# EAGLE board ClassD-V1 (EAGLE 9.5.1)
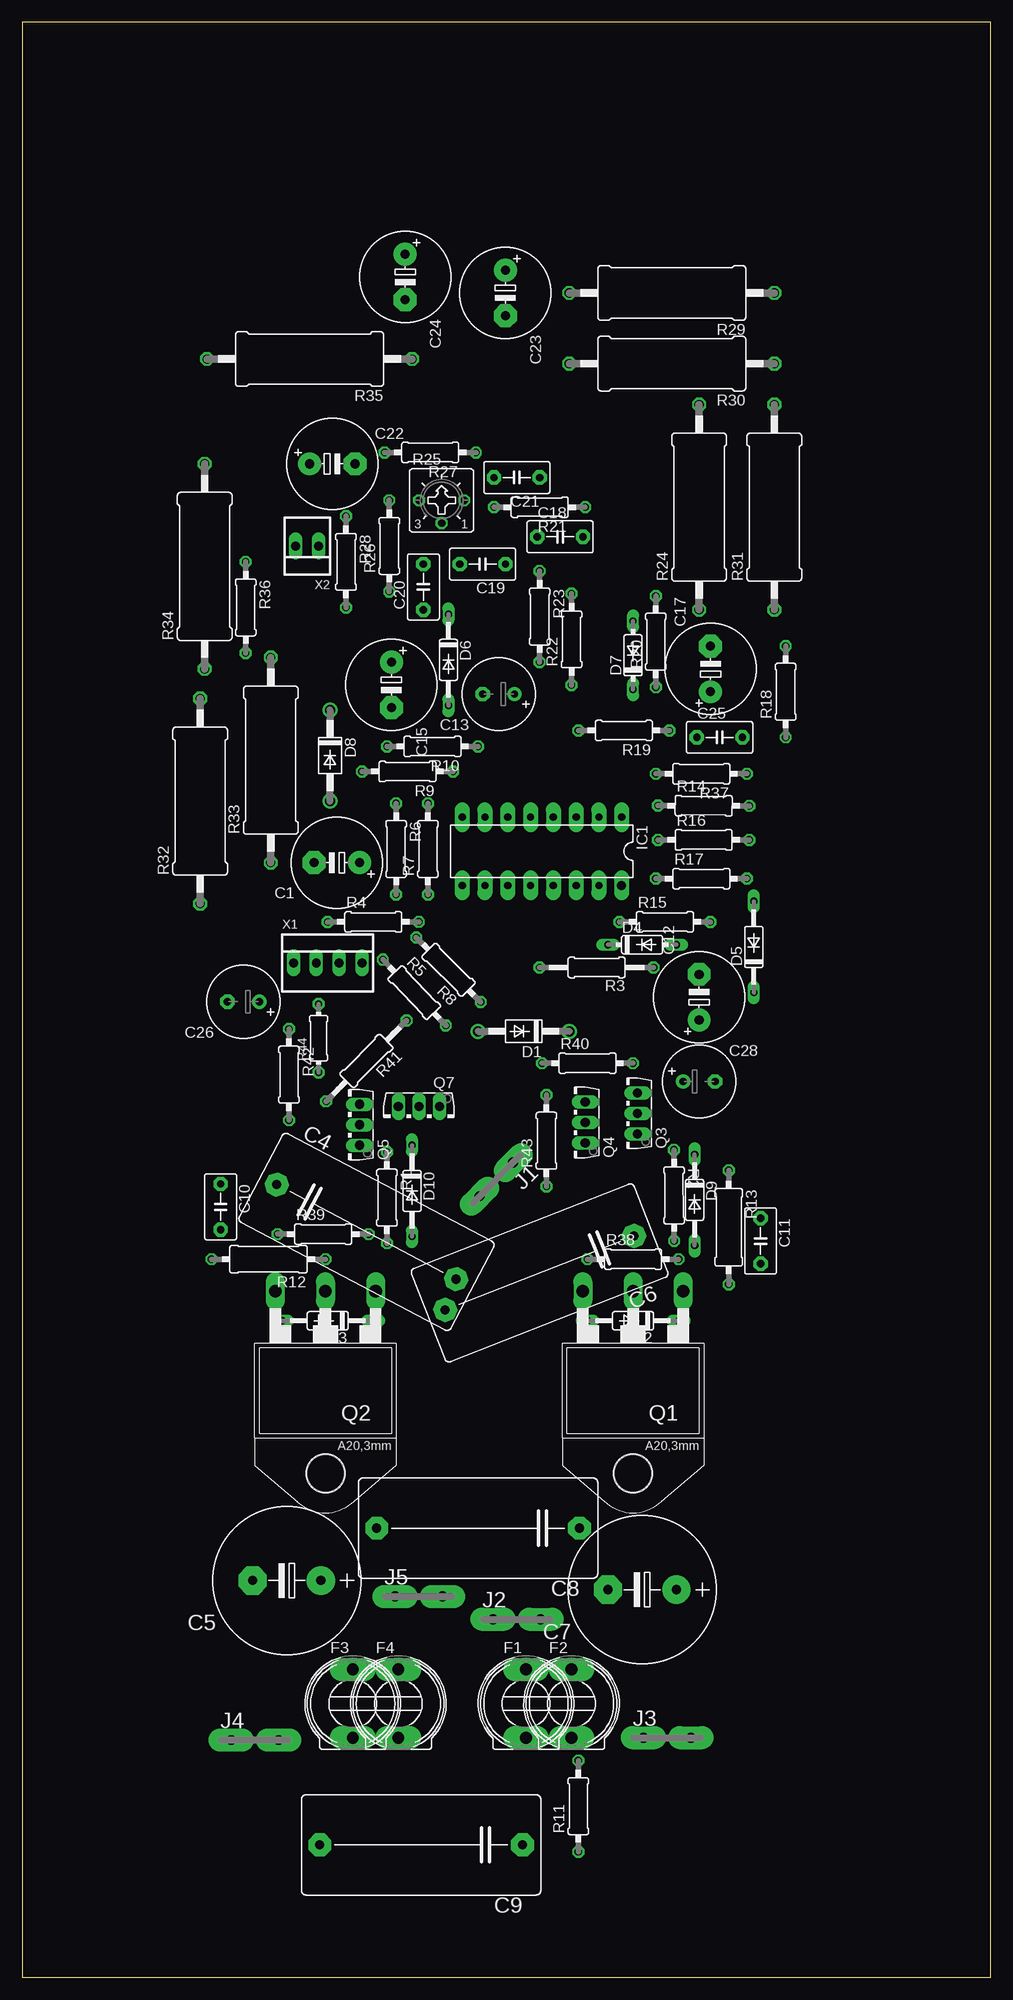
[diagram p0: board, top side]
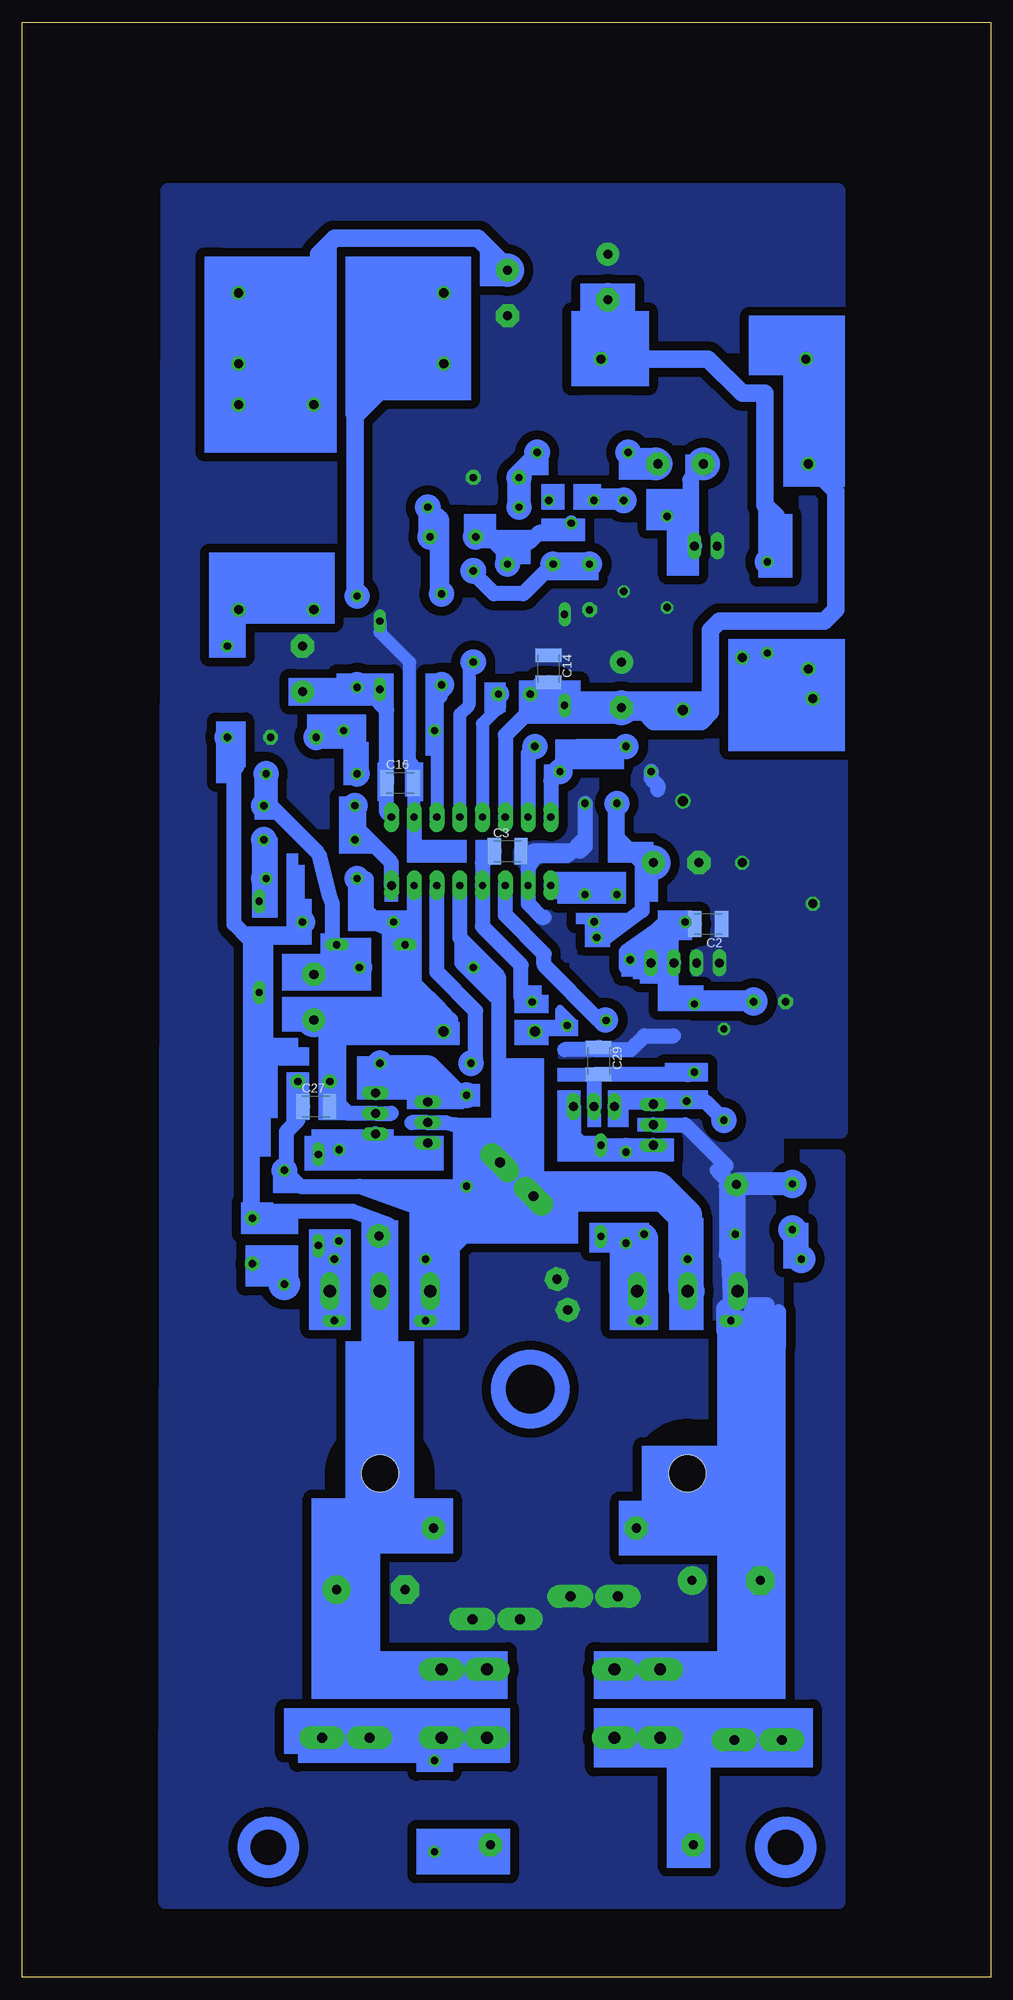
[diagram p1: board, bottom side, seen from below]

Size 107.93 x 217.86 mm. Coordinates in mm from the lower left corner, seen from the top.
Outline: 0,0 107.93,0 107.93,217.86 0,217.86 0,0
Copper layers (1*16): Top 0.035mm / dielectric 1.5mm / Bottom 0.035mm
Design rules "default": minimum track width 10mil, minimum drill 24mil, track to track 8mil, track to pad 8mil, pad to pad 8mil, via to via 8mil, smd to smd 8mil, copper to edge 40mil, drill to drill 8mil, minimum pad ring 10mil, minimum via ring 8mil, stop-mask expansion 4mil, vias tented up to drill 0mil, thermal gap 10mil

## Footprints (pad centres in the part's own frame; a part is rotated, then mirrored left to right if it is on the bottom)
E5-10,5 = drill 1.016 pad 2.54: + -2.54,0 | drill 1.016 pad 2.54 octagon: - 2.54,0
C1210K = smd 1.5 x 2.9: 1 -1.5,0; 2 1.5,0
C22.5B11 = drill 1.016 pad 2.54 octagon: 1 -11.303,0; 2 11.303,0
E7,5-16 = drill 1.016 pad 3.15: + -3.81,0 | drill 1.016 pad 3.15 octagon: - 3.81,0
C5B3.5 = drill 0.813 pad 1.6 octagon: 1 -2.54,0; 2 2.54,0
E3,5-8 = drill 0.813 pad 1.6: + -1.778,0 | drill 0.813 pad 1.6 octagon: - 1.778,0
DO41-10 = drill 1.118: A 5.08,0; C -5.08,0
DO35-10 = drill 0.813 long: A 5.08,0; C -5.08,0
DO35-7 = drill 0.813 long: A 3.81,0; C -3.81,0
KS9V = drill 1.321 pad 2.54 long: 1 0,3.81; 2 0,-3.81
DIL16 = drill 0.813 pad 1.676 long: 1 -8.89,-3.81; 2 -6.35,-3.81; 3 -3.81,-3.81; 4 -1.27,-3.81; 5 1.27,-3.81; 6 3.81,-3.81; 7 6.35,-3.81; 8 8.89,-3.81; 9 8.89,3.81; 10 6.35,3.81; 11 3.81,3.81; 12 1.27,3.81; 13 -1.27,3.81; 14 -3.81,3.81; 15 -6.35,3.81 | drill 1 pad 1.676 long: 16 -8.89,3.81
F061.040 = drill 1.1 pad 2.54 long: A1 -2.65,0; A2 2.65,0
TOP3 = drill 1.397 long: 1 -5.588,-7.62; 2 0,-7.62; 3 5.588,-7.62 | hole 4.115: 0,12.7
TO126AV = drill 1.016 long: B 2.286,-1.27; C 0,-1.27; E -2.286,-1.27
0207/10 = drill 0.813 octagon: 1 -5.08,0; 2 5.08,0
0207/12 = drill 0.813 octagon: 1 -6.35,0; 2 6.35,0
0309/12 = drill 0.813 octagon: 1 -6.35,0; 2 6.35,0
0617/22 = drill 1.016 octagon: 1 -11.43,0; 2 11.43,0
CT6 = drill 0.813 octagon: A 2.515,0; E -2.515,0; S 0,-2.54
0204/7 = drill 0.813 octagon: 1 -3.81,0; 2 3.81,0
22-23-2041 = drill 1 long: 1 -3.81,0; 2 -1.27,0; 3 1.27,0; 4 3.81,0
22-23-2021 = drill 1 long: 1 -1.27,0; 2 1.27,0

## Placement (x,y rotation side)
C1  22uF  [E5-10,5]  35.05,124.21 180 top
C2  .1  [C1210K]  31.5,117.35 180 bottom
C3  .1  [C1210K]  53.85,125.48 0 bottom
C4  220nF  [C22.5B11]  38.35,83.06 332.2 top
C5  470uF  [E7,5-16]  29.46,44.2 180 top
C6  220nF  [C22.5B11]  57.66,78.49 201.4 top
C7  470uF  [E7,5-16]  69.09,43.18 180 top
C8  220nF  [C22.5B11]  50.8,50.04 180 top
C9  220nF  [C22.5B11]  44.45,14.73 180 top
C10  1nF  [C5B3.5]  22.1,85.85 270 top
C11  1nF  [C5B3.5]  82.3,82.04 270 top
C12  22uF  [E5-10,5]  75.44,109.22 90 top
C13  10uF  [E3,5-8]  53.09,143 180 top
C14  .1  [C1210K]  49.28,145.8 270 bottom
C15  22uF  [E5-10,5]  41.15,144.02 270 top
C16  .1  [C1210K]  65.79,133.1 0 bottom
C17  22uF  [E5-10,5]  76.71,145.8 90 top
C18  2n2  [C5B3.5]  59.94,160.53 0 top
C19  2n2  [C5B3.5]  51.31,157.48 180 top
C20  1nF  [C5B3.5]  44.7,154.94 90 top
C21  HF_FLT  [C5B3.5]  55.12,167.13 180 top
C22  22uF  [E5-10,5]  34.54,168.66 0 top
C23  22uF  [E5-10,5]  53.85,187.71 270 top
C24  22uF  [E5-10,5]  42.67,189.48 270 top
C25  150pF  [C5B3.5]  77.72,138.18 0 top
C26  10uF  [E3,5-8]  24.64,108.71 180 top
C27  .1  [C1210K]  75.18,97.03 0 bottom
C28  10uF  [E3,5-8]  75.44,99.82 0 top
C29  .1  [C1210K]  43.69,102.11 270 bottom
D1  MUR1100  [DO41-10]  55.88,105.41 180 top
D2  18V  [DO35-10]  68.07,73.15 180 top
D3  18V  [DO35-10]  34.04,73.15 180 top
D4  15V  [DO35-7]  69.09,115.06 0 top
D5  MUR  [DO35-10]  81.53,114.81 90 top
D6  5V6  [DO35-10]  47.5,146.81 270 top
D7  5V6  [DO35-7]  68.07,147.32 90 top
D8  MUR1100  [DO41-10]  34.29,136.14 270 top
D9  4148  [DO35-10]  74.93,86.61 270 top
D10  4148  [DO35-10]  43.43,87.63 270 top
F1  7A  [KS9V]  56.13,30.48 0 top
F2  [KS9V]  61.21,30.48 0 top
F3  [KS9V]  36.83,30.48 0 top
F4  7A  [KS9V]  41.91,30.48 0 top
IC1  IRS2092  [DIL16]  57.91,125.48 180 top
J1  PWM  [F061.040]  52.83,88.9 225 top
J2  GND  [F061.040]  55.12,39.88 0 top
J3  VCC  [F061.040]  71.88,26.67 0 top
J4  VEE  [F061.040]  25.91,26.42 0 top
J5  PWMGND  [F061.040]  44.2,42.42 0 top
Q1  FQA27N25  [TOP3]  68.07,68.83 180 top
Q2  FQA27N25  [TOP3]  33.78,68.83 180 top
Q3  BD139  [TO126AV]  67.31,96.27 90 top
Q4  BD140  [TO126AV]  61.47,95.25 90 top
Q5  BD140  [TO126AV]  36.32,95 90 top
Q7  BD139  [TO126AV]  44.2,95.76 180 top
R1  10  [0207/10]  40.64,86.87 270 top
R2  10  [0207/10]  72.64,87.12 270.1 top
R3  0R  [0207/12]  64.01,112.52 180 top
R4  10  [0207/10]  39.12,117.6 0.1 top
R5  4R7  [0207/10]  43.69,109.73 313.7 top
R6  NC  [0207/10]  41.66,125.73 270 top
R7  10K  [0207/10]  45.21,125.73 90 top
R8  0  [0207/10]  47.5,112.27 135 top
R9  7K5  [0207/10]  42.93,134.37 180 top
R10  10K  [0207/10]  45.72,137.16 180 top
R11  1  [0207/10]  61.98,19.05 90 top
R12  10  [0309/12]  27.43,80.01 180 top
R13  10  [0309/12]  78.74,83.57 270 top
R14  10K  [0207/10]  75.95,130.56 359.8 top
R15  33K  [0207/10]  71.63,117.6 0 top
R16  9K1  [0207/10]  75.95,126.75 0 top
R17  10K  [0207/10]  75.69,122.43 0 top
R18  0R  [0207/10]  85.09,143.26 90 top
R19  100K  [0207/10]  67.06,138.94 180 top
R20  0R  [0207/10]  70.61,148.84 90 top
R21  3K  [0207/10]  57.66,163.83 180 top
R22  0R  [0207/10]  61.21,149.1 90 top
R23  0R  [0207/10]  57.66,151.64 270 top
R24  4K7  [0617/22]  75.44,163.83 90 top
R25  2K  [CT6]  46.74,164.59 0 top
R26  100  [0207/10]  40.89,159.51 90 top
R27  470  [0207/10]  45.47,169.93 180 top
R28  69K  [0207/10]  36.07,157.73 270 top
R29  4K7  [0617/22]  72.39,187.71 180 top
R30  4K7  [0617/22]  72.39,179.83 180 top
R31  4K7  [0617/22]  83.82,163.83 90 top
R32  4K7  [0617/22]  19.81,131.06 90 top
R33  4K7  [0617/22]  27.69,135.64 90 top
R34  4K7  [0617/22]  20.32,157.23 90 top
R35  4K7  [0617/22]  32,180.34 180 top
R36  0  [0207/10]  24.89,152.65 270 top
R37  1K  [0207/10]  75.69,134.11 180 top
R38  10K  [0207/10]  68.07,80.01 0 top
R39  10K  [0207/10]  33.53,82.8 0 top
R40  10  [0207/10]  62.99,101.85 0 top
R41  10  [0207/12]  38.35,102.11 225.1 top
R42  10K  [0207/10]  29.72,100.58 270 top
R43  10K  [0207/10]  58.42,93.22 90 top
R44  0R  [0204/7]  33.02,104.65 90 top
X1  12V  [22-23-2041]  34.04,113.03 0 top
X2  IN  [22-23-2021]  31.75,159.51 180 top

## Library data of the parts
C1-C3 C5 C7 C12-C17 C22-C24 C26-C29 R1-R24 R26-R44 = resistor
C4 C6 C8-C11 C18-C21 C25 = capacitor-wima
D1-D10 = diode
F1-F4 = fuse; OC_FARNELL: unknown; OC_NEWARK: unknown
IC1 = ic-package
J1-J5 = con-faston; OC_FARNELL: unknown; OC_NEWARK: unknown
Q1 Q2 = transistor-fet
Q3-Q5 Q7 = transistor-power
R25 = pot
X1 = con-molex; MF: MOLEX; MPN: 22-23-2041; OC_FARNELL: 1462920; OC_NEWARK: 38C0355
X2 = con-molex; MF: MOLEX; MPN: 22-23-2021; OC_FARNELL: 1462926; OC_NEWARK: 25C3832

## Nets
COM: C1.- C2.1 C3.2 C4.1 C5.- C8.2 C10.1 C26.- C29.1 D3.A D8.A F3.1 F4.1 IC1.10 Q2.3 Q5.C R7.2 R9.2 R32.1 R33.1 R39.1 R42.1 X1.1 X1.2
N$1: D2.C D9.A Q1.1 R2.2 R38.2
N$3: D3.C D10.A Q2.1 R1.2 R39.2
N$4: IC1.8 R9.1 R10.2
N$5: C6.1 C7.+ C8.1 C11.1 D5.C F1.1 F2.1 Q1.2 R15.2 R18.1
N$6: IC1.14 R40.1
N$7: IC1.11 R41.1
N$8: D1.A R5.2
N$9: C9.2 F3.2 F4.2 J4.A1 J4.A2
N$10: C3.1 IC1.12 R8.1
N$11: C12.+ C27.2 C28.+ D1.C D4.C IC1.15 Q3.C R15.1 R17.1
N$12: IC1.9 R6.2 R7.1
N$13: C1.+ R4.2 R6.1 R8.2
N$14: C9.1 R11.1
N$15: C11.2 R13.2
N$16: D9.C Q3.E Q4.E R2.1
N$17: R25.E R26.2
N$18: C2.2 C26.+ R4.1 R5.1 R44.2 X1.3 X1.4
N$19: IC1.7 R10.1
N$20: F1.2 F2.2 J3.A1 J3.A2 R11.2
N$21: C10.2 R12.2
N$22: IC1.16 R14.1 R16.1
N$23: D5.A R16.2 R17.2
N$24: C13.+ IC1.5
N$25: C25.1 R19.1 R37.2
N$26: IC1.3 R19.2 R22.1
N$27: C18.1 C19.1 R25.S
N$28: C19.2 C20.2 R23.1
N$29: C18.2 R21.1 R22.2
N$30: IC1.4 R23.2
N$31: R18.2 R24.1 R31.1
N$32: C21.2 R21.2 R27.1
N$33: C22.- R27.2
N$34: C22.+ R28.1 X2.1
N$35: C24.- R35.1 R36.1
N$36: C23.+ R24.2 R29.1 R30.1 R31.2
N$37: R20.2 R29.2 R30.2
N$38: R32.2 R33.2 R34.1 R36.2
N$39: C13.- C14.2 C15.- D6.A D8.C IC1.6 R34.2 R35.2
N$40: C12.- D4.A R3.1 R14.2 R37.1
N$41: C27.1 C28.- D2.A IC1.13 J1.A1 J1.A2 Q1.3 Q2.2 Q4.C R3.2 R12.1 R13.1 R38.1 R43.1
N$43: Q5.B Q7.B R41.2 R42.2
N$44: Q3.B Q4.B R40.2 R43.2
N$45: C29.2 Q7.C R44.1
N$47: D10.C Q5.E Q7.E R1.1
PGND: C4.2 C5.+ C6.2 C7.- C14.1 C15.+ C16.2 C17.- C20.1 C21.1 C23.- C24.+ C25.2 D6.C D7.A IC1.2 J2.A1 J2.A2 J5.A1 J5.A2 R26.1 R28.2 X2.2
PGND1: C16.1 C17.+ D7.C IC1.1 R20.1

## Tracks (layer width: path | path; a pad name or v marks a point on that pad's centre or on a via)
COM
  Bottom 1.422: C5.- 27.94,34.29 F3.1 F4.1
  Bottom 1.676: 29.46,88.14 29.46,80.52 29.21,80.26 D3.A | IC1.10 51.56,123.7 50.8,124.97 47.24,124.97 45.21,127 R7.2 45.21,125.98 45.72,125.48 51.05,125.48 51.56,124.97 51.56,119.63 50.04,118.11 49.78,118.11 | R9.2 37.85,133.6 37.08,132.84 37.08,132.33 | D3.A 28.96,76.2 28.19,76.2 28.19,88.33 C4.1 28.89,88.33 30.48,89.92 29.46,90.42 34.04,95 Q5.C | C8.2 28.96,51.56 28.96,52.07 | 28.96,52.07 D3.A | 23.62,74.17 23.62,70.36 24.89,70.36 24.89,74.93 26.67,74.93 26.67,73.91 25.65,73.91 25.65,71.88 25.91,71.88 25.91,73.66 26.92,73.66 26.92,71.88 27.18,71.88 27.18,73.41 28.45,73.41 28.45,71.88 28.7,71.88 28.7,74.42 29.46,74.42 29.46,71.88 29.72,71.88 29.72,74.68 | C5.- 27.69,43.18 27.69,52.07 28.96,52.07 | C29.1 43.92,103.38 | 43.92,103.38 47.5,103.38 | 43.92,103.38 40.13,103.38 38.61,104.9 35.31,104.9
  Bottom 2.54: C10.1 28.36,88.39 C4.1
  pour Bottom (isolate 1.016, no thermals): 38.61,137.41 16.76,137.41 16.76,94.23 23.88,94.23 23.88,72.39 41.91,72.39 62.99,103.38 62.74,103.12 50.55,129.29 46.99,132.84 39.88,133.1
N$1
  Bottom 1.676: R38.2 73.15,82.51 R2.2 73.16,81.53 D9.A | R38.2 D2.C | R38.2 73.66,79.5 Q1.1
  Bottom 1.93: Q1.1 73.15,76.96 D2.C
N$2
  Bottom 1.676: 36.83,116.84 40.64,113.79 40.64,112.52 39.88,112.52 40.64,114.3 36.32,117.35
N$3
  Bottom 1.676: D10.A 42.93,82.04 40.64,82.04 | R39.2 39.62,81.79 R1.2 | 41.15,81.79 R1.2 | R1.2 40.64,82.04 | R1.2 40.39,82.04 40.64,82.04
  Bottom 1.93: R1.2 D3.C 39.37,79.76 Q2.1
N$4
  Bottom 1.676: R10.2 45.97,137.16 48.01,135.13 R9.1 49.02,133.35 IC1.8
N$5
  Bottom 1.422: C7.+ 72.39,34.29 F2.1 F1.1
  Bottom 1.676: C8.1 68.07,51.56 | 68.07,51.56 Q1.2 68.07,83.12 C6.1 67.93,81.79 68.83,81.79 67.06,83.82 71.12,85.34 80.77,85.34 | C7.+ 72.64,51.05 68.07,51.05 68.07,51.56 | 80.77,85.34 C11.1 | 80.77,115.82 81.03,115.57 D5.C 81.03,106.43 82.3,105.16 82.3,85.34 82.04,85.09 81.03,85.09 80.77,85.34 | 80.77,115.82 82.8,115.82 84.33,117.35 84.33,137.41 84.58,137.67 | 80.77,115.82 80.52,116.08 77.47,116.08 77.47,117.09 77.22,117.09 R15.2 | R18.1 84.58,137.41 84.58,137.67 | 84.58,137.67 84.84,137.92
N$6
  Bottom 1.676: IC1.14 61.72,112.01 57.4,107.7 57.4,102.36 R40.1
N$7
  Bottom 1.676: IC1.11 54.1,118.36 49.78,114.05 49.78,112.78 43.69,106.68 42.93,106.68 42.85,106.61 R41.1 42.97,106.47
N$8
  Bottom 0.813: R5.2 47.08,106.17 46.48,106.17 46.48,106.43 48.01,107.95 48.01,106.43 47.24,106.43 47.5,106.68 | 47.5,106.68 47.5,107.19 | 47.5,106.68 47.5,105.92 48.01,105.41 D1.A
N$9
  Bottom 1.422: J4.A1 J4.A2 | 33.78,26.42 36.83,26.42 F3.2 F4.2
  Bottom 1.676: C9.2 33.78,14.73 33.78,26.42 J4.A2
N$10
  Bottom 1.676: R8.1 51.56,109.15 52.32,109.15 52.32,112.78 56.64,117.09 IC1.12 56.64,124.18 C3.1
N$11
  Bottom 1.676: D1.C 60.2,105.41 | 61.34,107.82 60.2,106.68 60.2,105.41 | 61.34,107.82 64.26,110.74 | 60.2,105.41 60.45,105.66 60.96,105.66 | IC1.15 64.26,117.6 | 64.26,117.6 64.26,110.74 | 64.26,117.6 R15.1 65.28,117.09 | 65.28,117.09 D4.C | R17.1 69.6,122.43 69.6,118.87 67.82,117.09 65.28,117.09 | 64.26,110.74 66.8,108.2 74.42,108.2 75.44,107.19 C12.+ | 66.8,96.27 Q3.C 71.63,96.27 72.64,97.28 | 72.64,97.28 72.64,107.95 72.52,107.82 61.34,107.82 | C28.+ 73.68,99.8 C27.2 72.9,97.03 72.64,97.28
N$12
  Bottom 1.676: R6.2 44.2,120.65 | 44.2,120.65 R7.1 | IC1.9 45.21,121.67 44.2,120.65
N$13
  Bottom 1.676: R6.1 41.66,127 38.86,124.21 | 38.86,124.21 38.86,118.87 41.78,116.71 | 41.78,116.71 42.89,115.86 R8.2 | R4.2 41.78,116.98 41.78,116.71 | C1.+ 38.86,124.21
N$14
  Bottom 1.676: C9.1 61.72,14.73 61.72,13.97 R11.1
N$15
  Bottom 1.676: R13.2 C11.2
N$16
  Bottom 1.676: Q4.E 64.01,91.69 67.82,91.69 | 67.82,91.69 D9.C 74.42,92.2 R2.1 | Q3.E 67.82,91.69
N$17
  Bottom 1.676: R25.E 44.96,165.1 41.15,165.1 R26.2
N$18
  Bottom 1.676: C2.2 34.3,117.35 R4.1 36.33,117.6 36.83,117.09 40.43,113.49 R5.1 37.98,112.39 X1.4 X1.3 35.56,112.78 35.81,112.78 35.81,110.49 34.29,108.97 R44.2 26.67,108.46 C26.+
N$19
  Bottom 1.676: R10.1 51.56,136.4 IC1.7
N$20
  Bottom 1.422: F1.2 F2.2 61.98,26.67 J3.A1 J3.A2
  Bottom 1.676: R11.2 61.98,26.67
N$21
  Bottom 1.676: R12.2 22.1,81.03 C10.2
N$22
  Bottom 1.676: IC1.16 66.8,124.21 70.87,128.27 | R14.1 70.87,130.32 70.87,128.27 | 70.87,128.27 R16.1
N$23
  Bottom 1.676: R16.2 R17.2 D5.A
N$24
  Bottom 1.422: 54.86,141.48 56.64,139.7 IC1.5
  Bottom 1.676: C13.+ 54.86,141.48
N$25
  Bottom 1.676: R37.2 70.61,137.92 R19.1 72.14,139.19 71.12,138.18 C25.1
N$26
  Bottom 0.406: R19.2 61.72,138.94 61.72,140.97
  Bottom 1.422: R22.1 61.21,142.75 61.72,142.24 61.72,140.97 IC1.3
  Bottom 1.676: 61.72,129.54 IC1.3 61.72,129.03
N$27
  Bottom 1.676: C19.1 53.85,158.5 55.24,159.89 | 55.24,159.89 55.88,160.53 C18.1 | 55.24,159.89 51.44,159.89 50.29,161.04 47.24,161.04 46.74,161.54 R25.S
N$28
  Bottom 1.676: R23.1 57.66,156.46 55.37,154.18 52.07,154.18 C19.2 C20.2
N$29
  Bottom 1.676: R21.1 61.21,162.56 61.21,160.53 | 61.21,160.53 R22.2 | C18.2 61.21,160.53
N$30
  Bottom 1.422: R23.2 58.17,146.05 58.17,141.73 59.18,140.72 IC1.4
N$31
  Bottom 1.93: R24.1 R31.1 R18.2
N$32
  Bottom 1.676: C21.2 52.58,166.62 | 52.58,166.62 R21.2 | R27.1 52.83,167.64 52.83,166.37 52.58,166.62
N$33
  Bottom 1.676: C22.- 39.62,168.66 40.39,169.42 R27.2
N$34
  Bottom 1.676: C22.+ 33.53,166.88 33.53,162.81 | 33.53,162.81 33.53,160.27 33.02,159.77 X2.1 33.02,159.26 | R28.1 33.53,162.81
N$35
  Bottom 1.93: C24.- 43.43,186.18 R35.1 31.5,180.34 27.69,176.53 25.15,176.53 25.15,164.08 23.88,162.81 23.88,158.75 R36.1
N$36
  Bottom 1.93: R29.1 R30.1 R31.2 R24.2 74.93,175.77 74.93,192.02 73.15,193.8 57.15,193.8 53.85,190.5 C23.+
N$37
  Bottom 1.93: R20.2 70.87,153.92 70.87,173.99 65.02,179.83 R30.2 | R29.2 R30.2 | R30.2 60.96,179.58 61.21,179.32 61.21,179.58 R30.2
N$38
  Bottom 1.93: R34.1 24.64,147.32 | R34.1 R32.2 23.62,146.3 R33.2 | R36.2 23.11,145.8 R34.1
N$39
  Bottom 1.676: C13.- 51.31,141.22 54.1,138.43 IC1.6 | C15.- 47.75,141.48 | C13.- 49.78,141.48 47.75,141.48 | C13.- 50.04,144.27 49.28,144.27 C14.2 | D6.A 47.75,141.48 | D8.C 34.54,139.95
  Bottom 1.93: R35.2 20.32,180.09 R34.2 17.27,165.61 17.27,152.4 18.54,151.13 30.23,151.13 31.24,150.11 31.24,140.97 32.26,139.95 34.54,139.95 37.59,139.95 38.61,140.97 41.91,140.97 41.4,141.48 C15.-
N$40
  Bottom 1.676: 81.01,130.56 R14.2 80.77,130.79 80.77,131.06 | R37.1 80.77,131.06 | 80.77,131.06 74.93,125.22 73.66,120.4 73.41,119.63 73.41,115.06 | 73.41,115.06 73.41,114.55 | R3.1 73.15,112.52 | 73.15,112.52 73.91,112.52 74.42,112.01 75.44,112.01 C12.- | D4.A 73.15,114.81 | 73.15,114.81 73.15,112.52 | 73.15,114.81 73.41,115.06
N$41
  Bottom 1.676: 55.12,109.22 58.93,113.03 58.93,115.57 | IC1.13 59.18,115.82 58.93,115.57 | 58.93,115.57 56.77,113.41 | 56.77,113.41 54.86,111.51 54.86,95 | 54.86,95 54.86,88.39 | 54.86,88.39 54.86,87.88 54.86,86.11 | 54.86,86.11 54.36,86.11 54.36,85.85 53.85,85.85 53.85,88.39 54.86,88.39 | 54.86,86.11 J1.A1 | J1.A1 J1.A2 | J1.A2 48.51,86.11 | J1.A1 54.61,86.11 54.61,87.63 48.66,87.63 J1.A2 | R12.1 Q2.2 | 60.07,82.68 61.98,85.09 70.36,88.14 76.96,88.14 R13.1 78.49,90.17 78.49,94.23 77.22,95.5 C28.- 77.22,97.56 C27.1 | R3.2 56.77,113.41 | R38.1 62.48,79.5 62.48,76.71 | R43.1 57.4,87.12 57.4,86.87 56.64,86.11 | 64.52,95.25 Q4.C 60.71,95.25 59.69,95 54.86,95
  Bottom 1.93: D2.A 62.48,81.03 62.48,76.71
  Bottom 3.81: Q2.2 34.04,76.71 34.04,84.84 37.08,87.88 54.86,87.88 56.64,86.11 60.07,82.68 61.21,81.53 62.48,81.53 62.48,76.71 Q1.3 62.48,75.69
N$43
  Bottom 1.676: R42.2 31.75,97.54 33.27,97.54 | 33.27,97.54 37.59,97.54 | Q5.B 37.59,97.54 | R41.2 33.27,97.97 33.27,97.54 | Q7.B 41.15,97.54 37.59,97.54
N$44
  Bottom 1.676: R43.2 58.93,98.3 | 58.93,98.3 62.48,101.85 62.74,101.85 | 62.74,101.85 67.31,101.85 | 67.31,101.85 R40.2 | Q4.B 62.74,101.85 | 62.74,101.85 59.18,98.3 58.93,98.3 | Q3.B 67.31,101.85
N$45
  Bottom 1.676: R44.1 33.78,100.58 43.69,100.58 | 43.69,100.58 44.2,100.58 Q7.C | C29.2 43.69,100.58
N$46
  Bottom 1.676: 64.26,129.54 64.26,126.49 63.75,125.98
N$47
  Bottom 1.676: Q7.E 46.48,93.73 45.47,92.71 D10.C 40.64,92.71 | 40.64,92.71 Q5.E | 40.64,91.69 R1.1 40.64,92.71
PGND
  Bottom 1.422: IC1.2 64.29,129.29 C16.2 64.29,134.9 64.77,135.64 64.77,146.56 68.07,149.86 D7.A
  pour Bottom (isolate 1.016, no thermals): 17.02,91.44 17.02,8.38 91.95,8.38 91.69,199.14 17.02,199.14 17.02,137.41 49.53,137.41 34.54,71.63 21.08,70.87 21.08,91.44
PGND1
  Bottom 1.27: R20.1 71.12,143.26 71.37,143.26
  Bottom 1.676: IC1.1 67.31,129.79 67.31,134.87 | 67.31,134.87 67.31,141.22 68.83,142.75 D7.C 71.37,143.26 C17.+ | C16.1 67.31,134.87
(copper drawn outside any net)
  shapes: Bottom area x337, Bottom circle x70